# Altium PCB Quadcopter_Main_PCB.PcbDoc (part 1 of 2)
Units mm, origin at the board's own origin, x right, y up, seen from the top; angles counter-clockwise.
Board outline 73 x 59 mm, 4 copper layers (Top Layer, Int1 (GND), Int2 (PWR), Bottom Layer), stack 1.586 mm thick; 101 components, 81 nets, 440 pads, 232 vias.
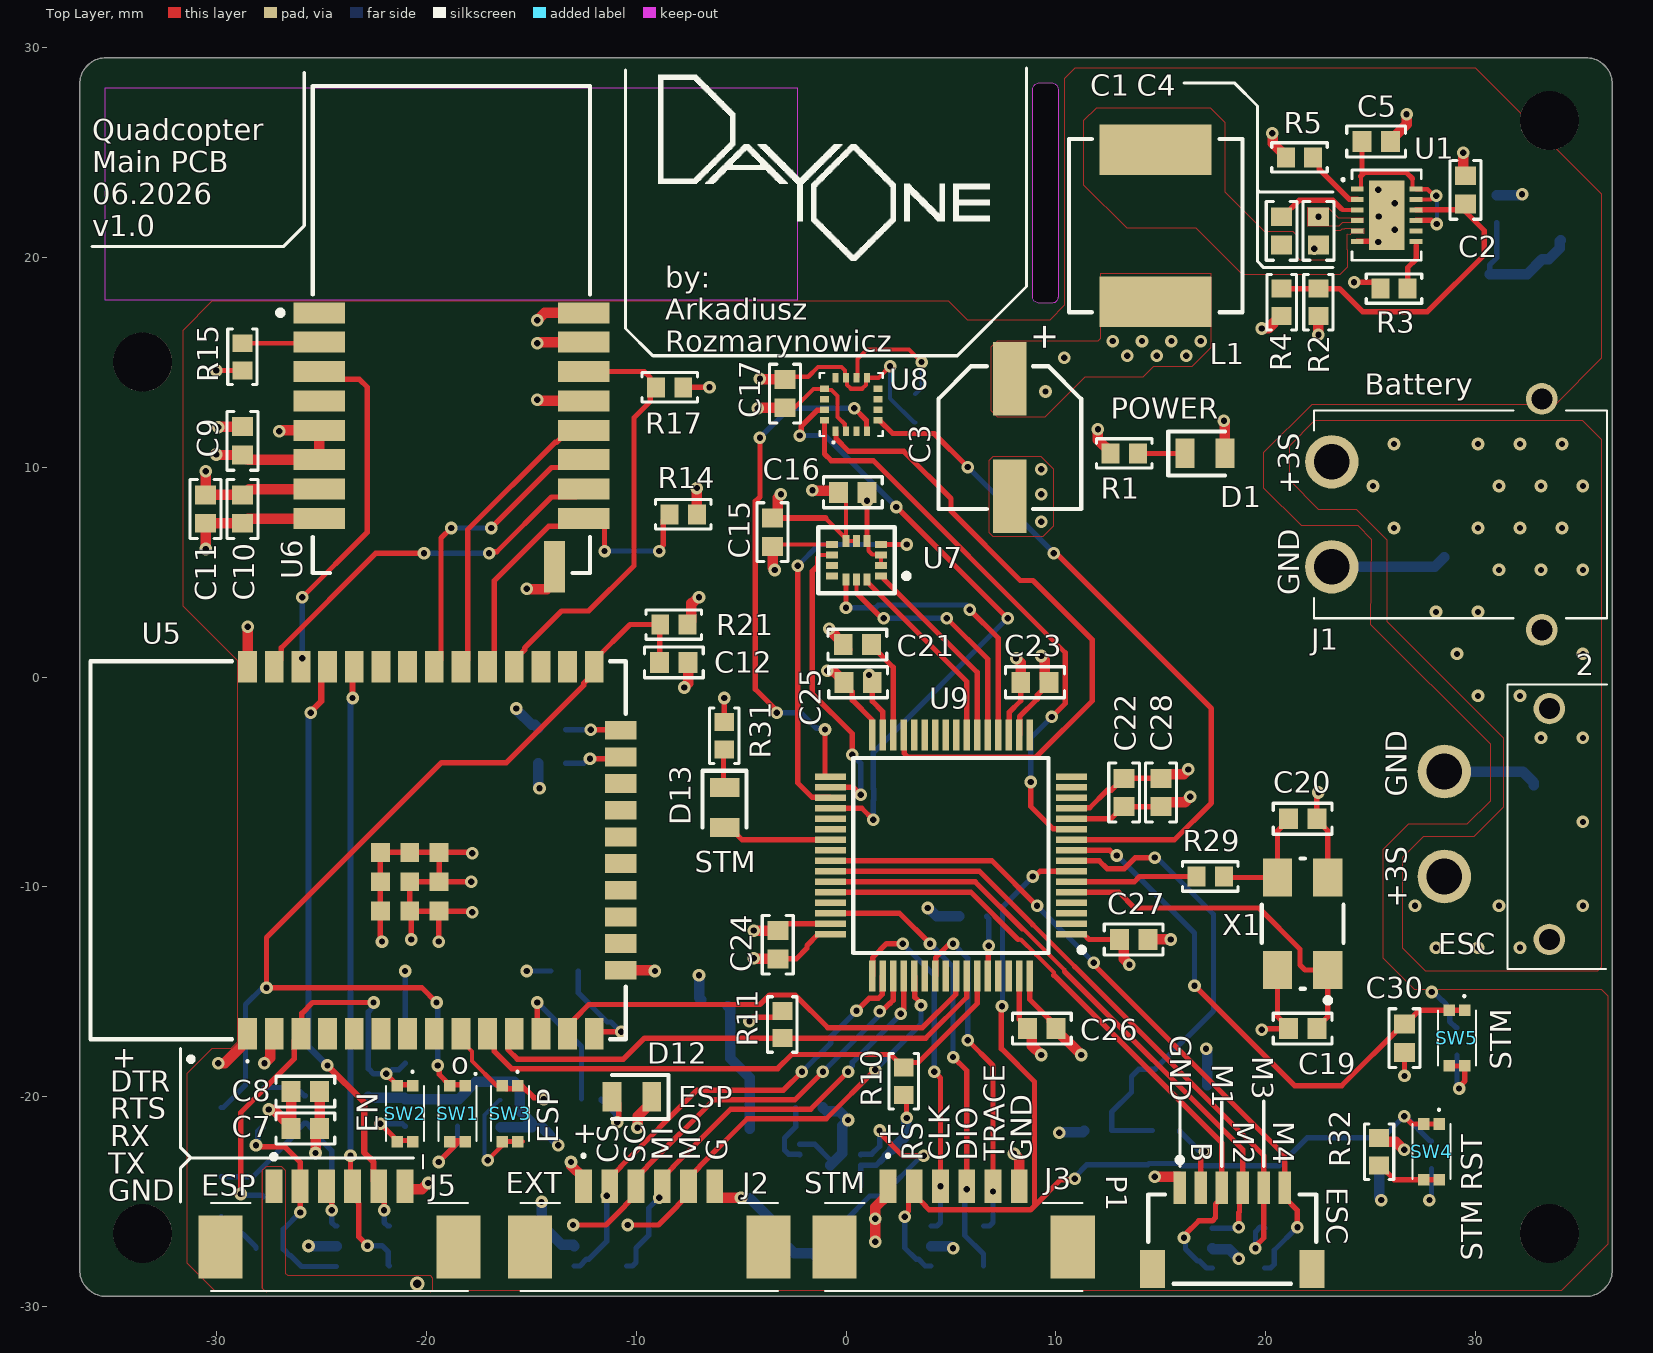
[diagram p0: Top Layer view]
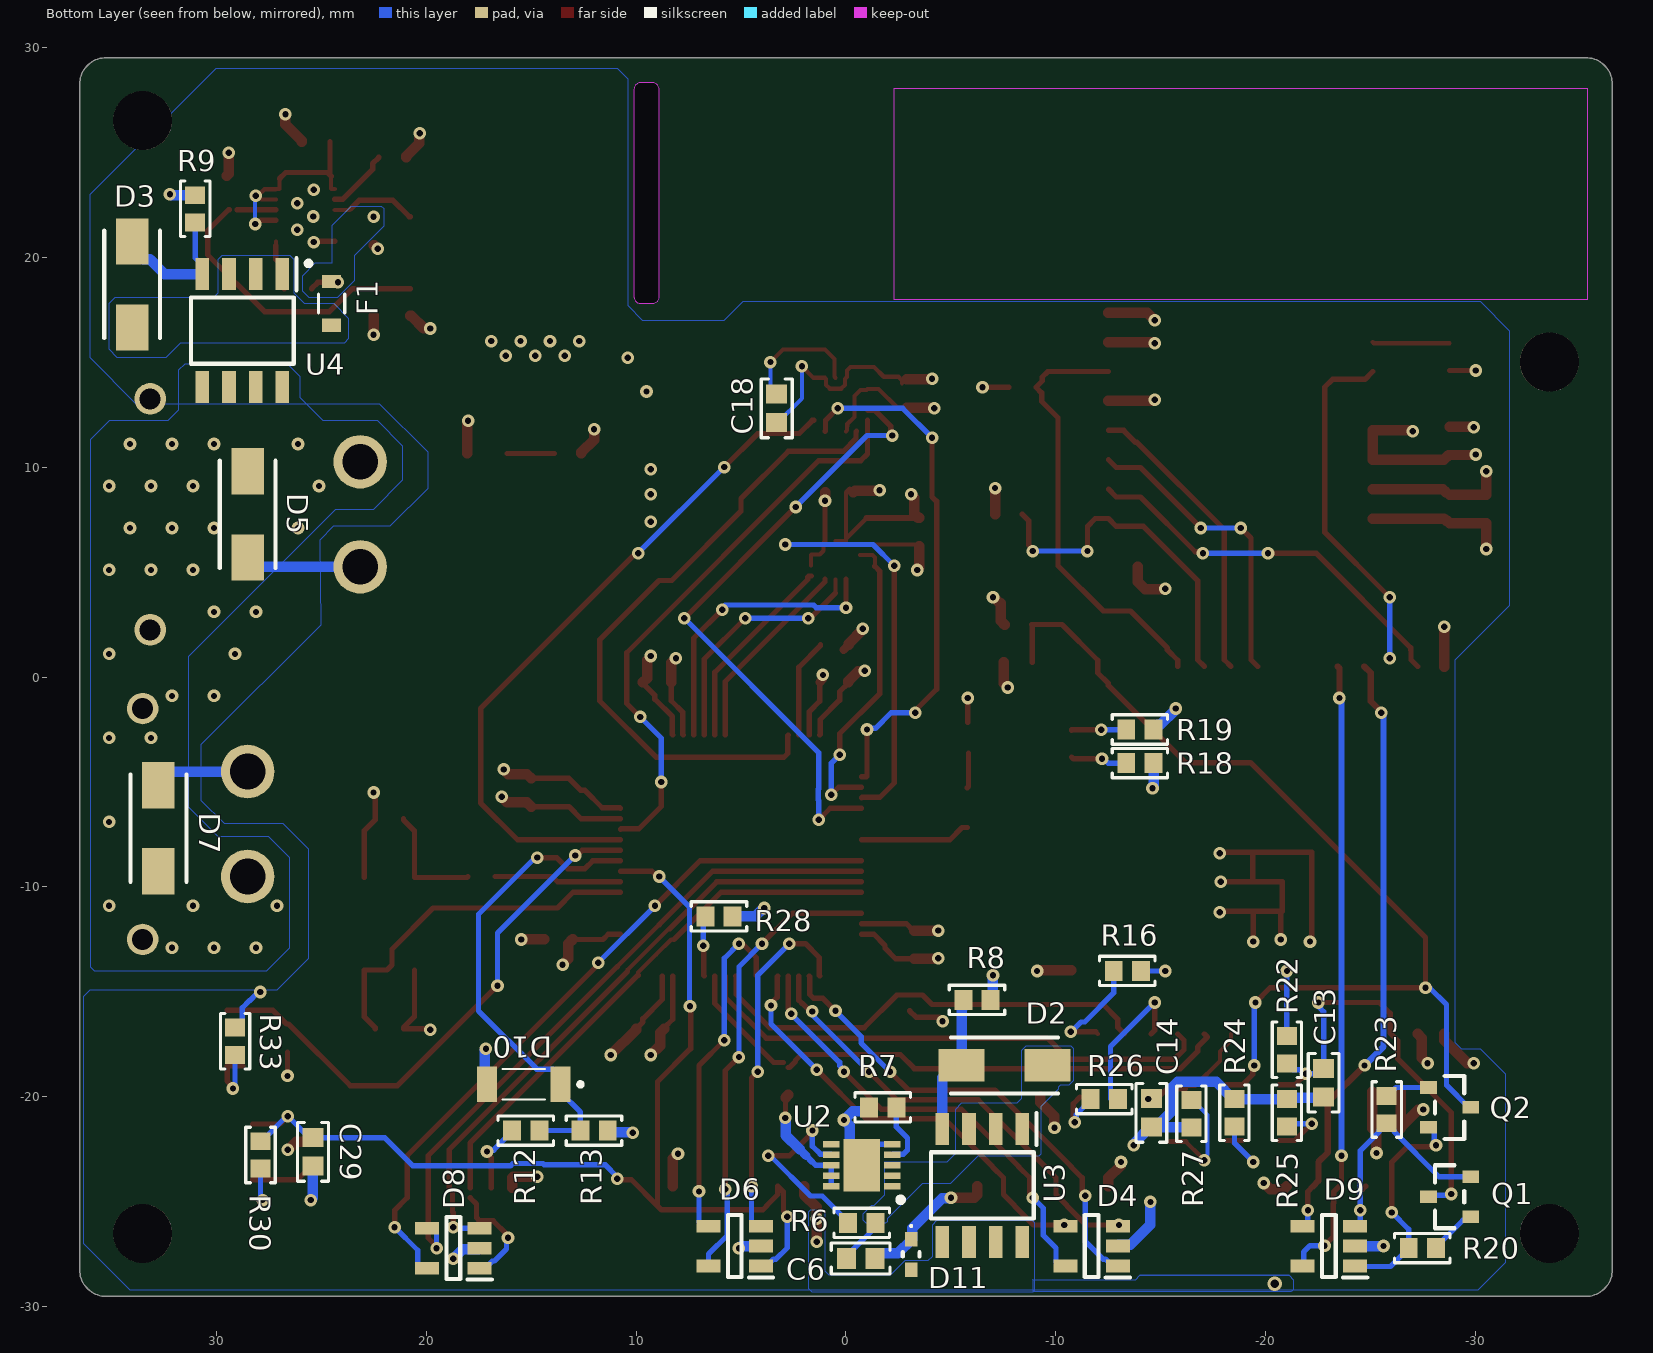
[diagram p1: Bottom Layer view, seen from below]
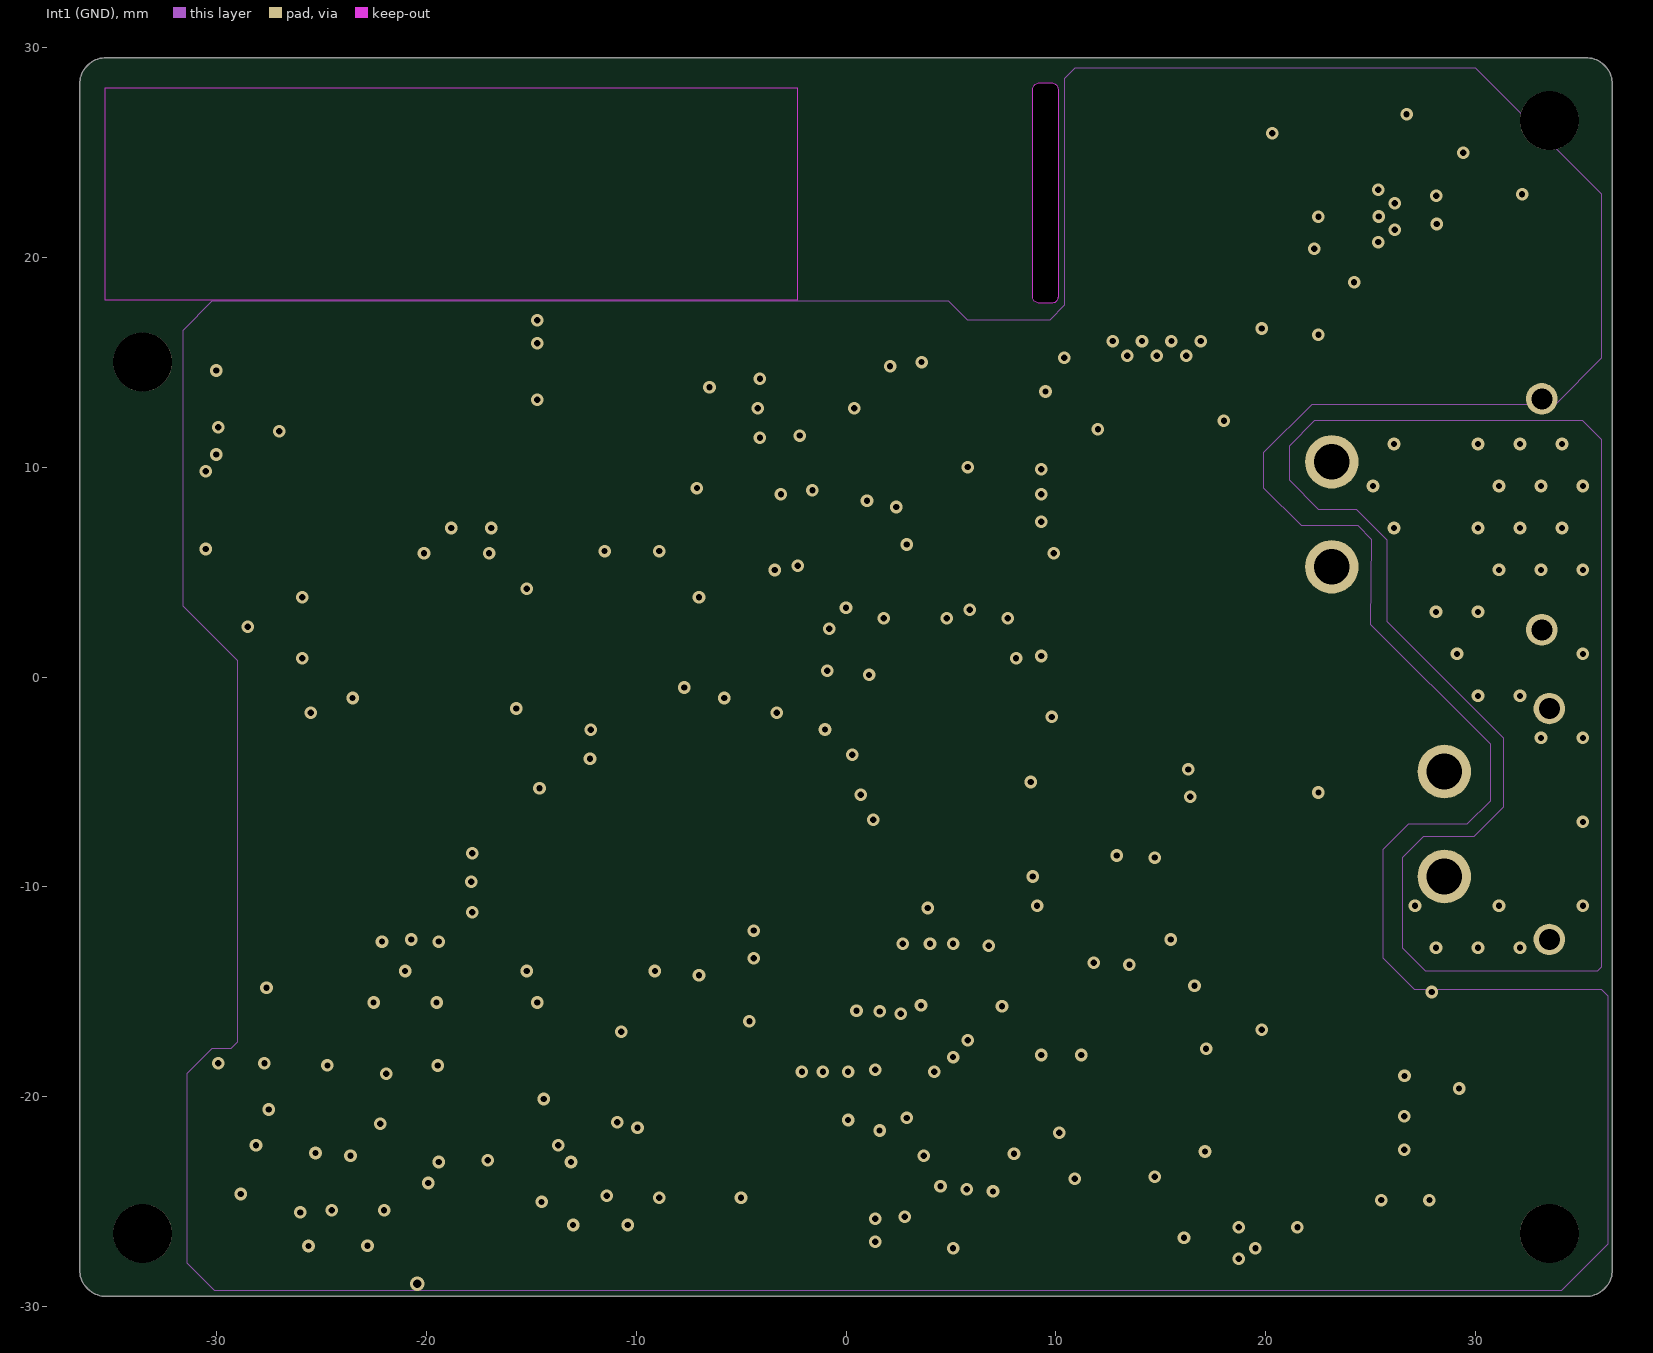
[diagram p2: Int1 (GND)]
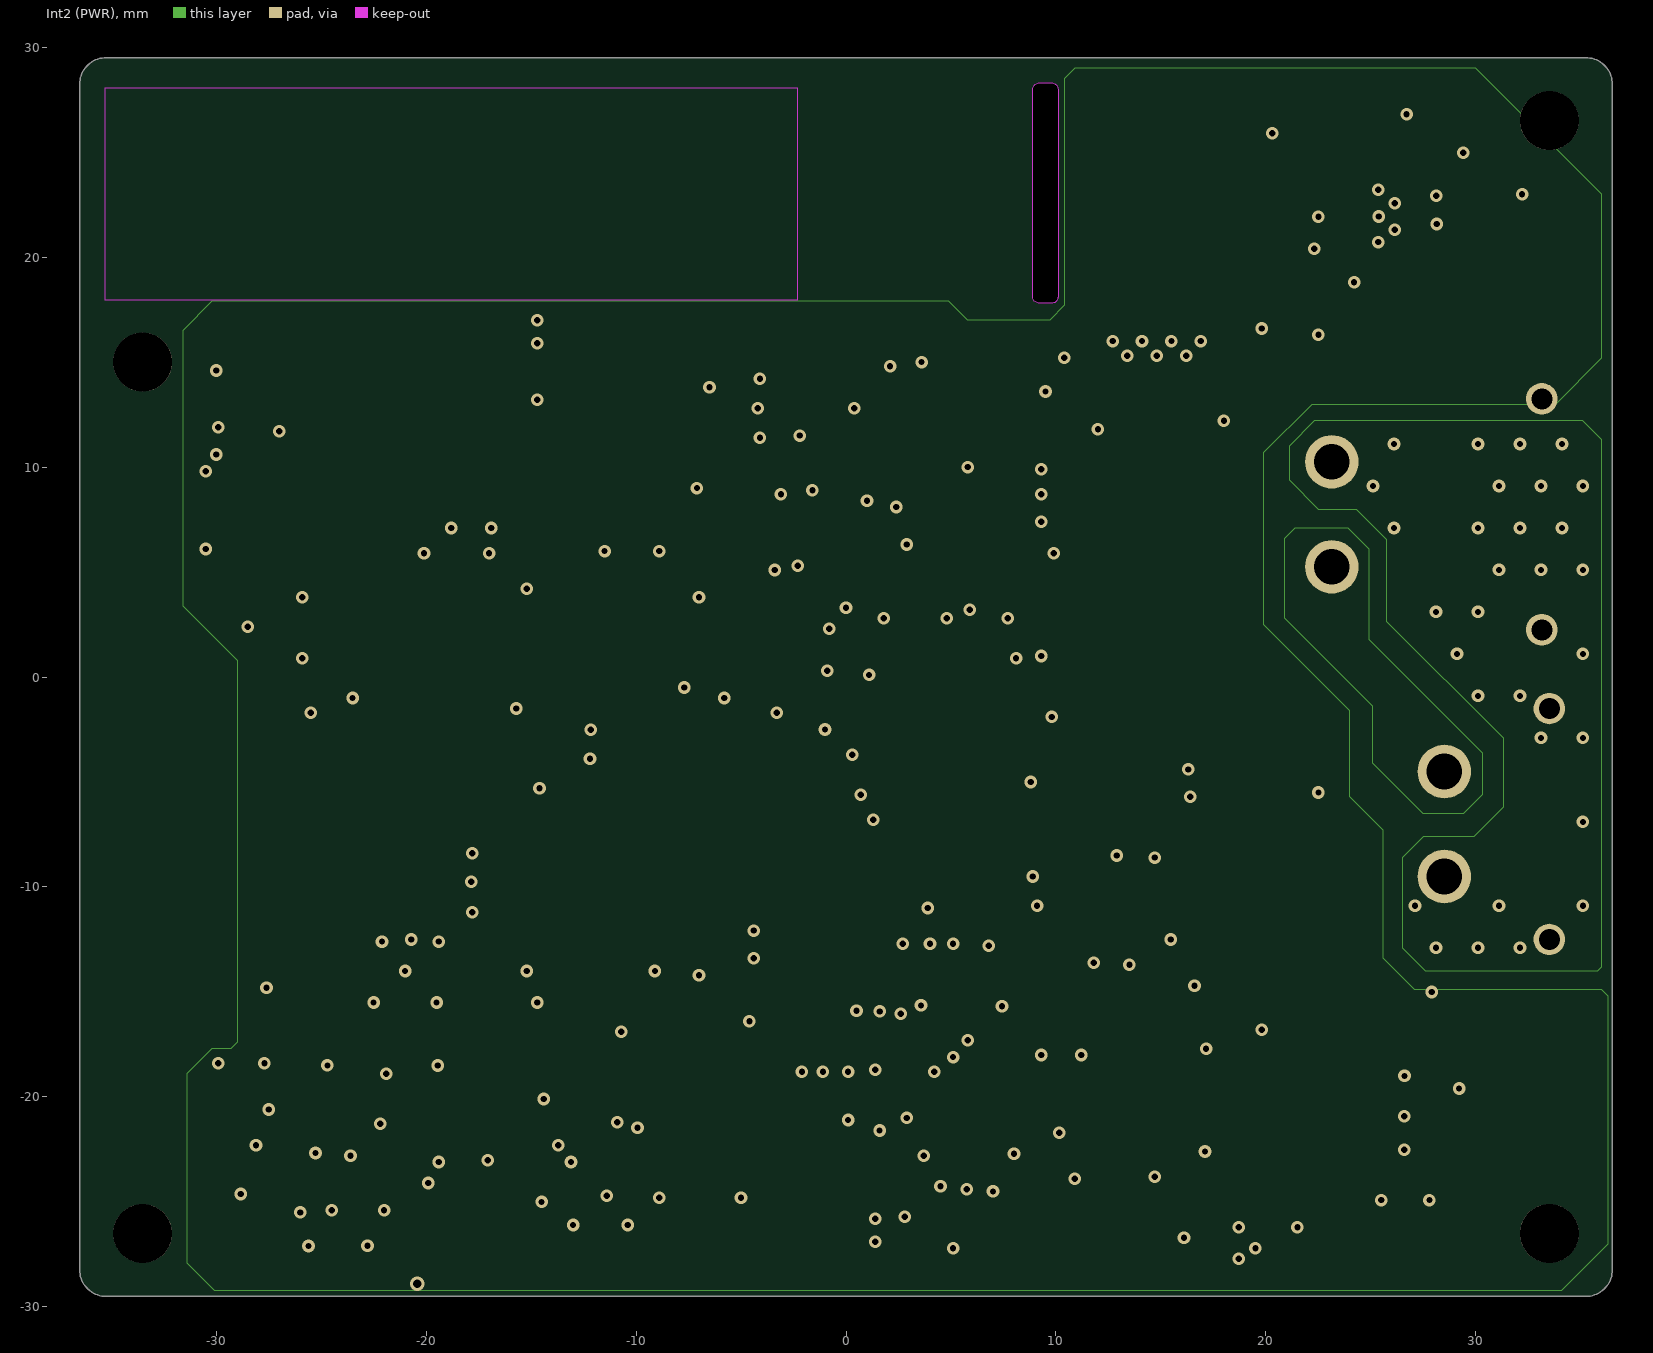
[diagram p3: Int2 (PWR)]
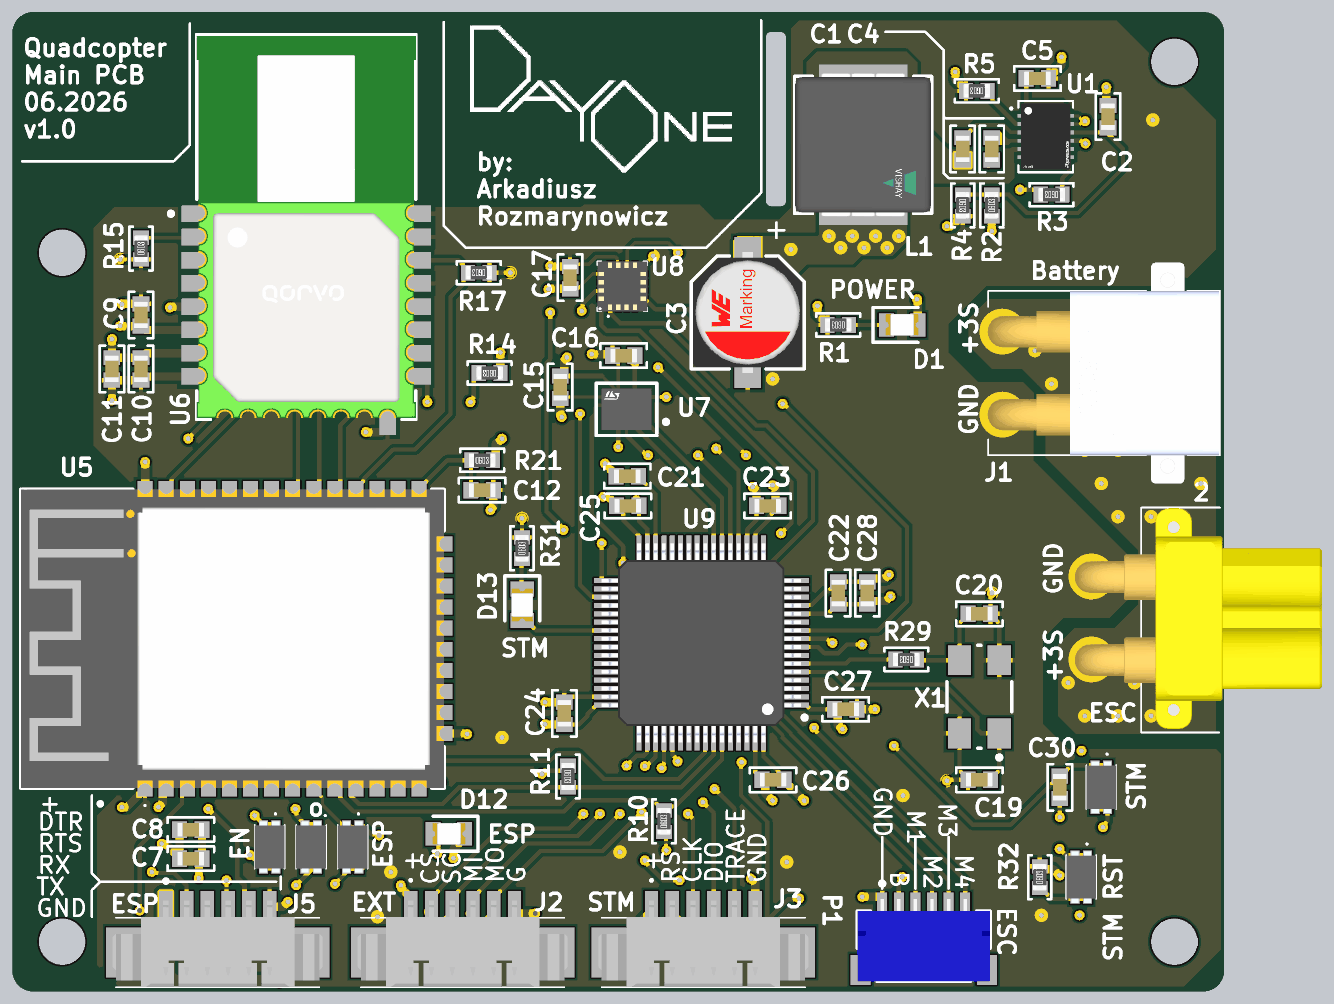
[diagram p5: 3D render of the assembled board from above, using the file's embedded part models]
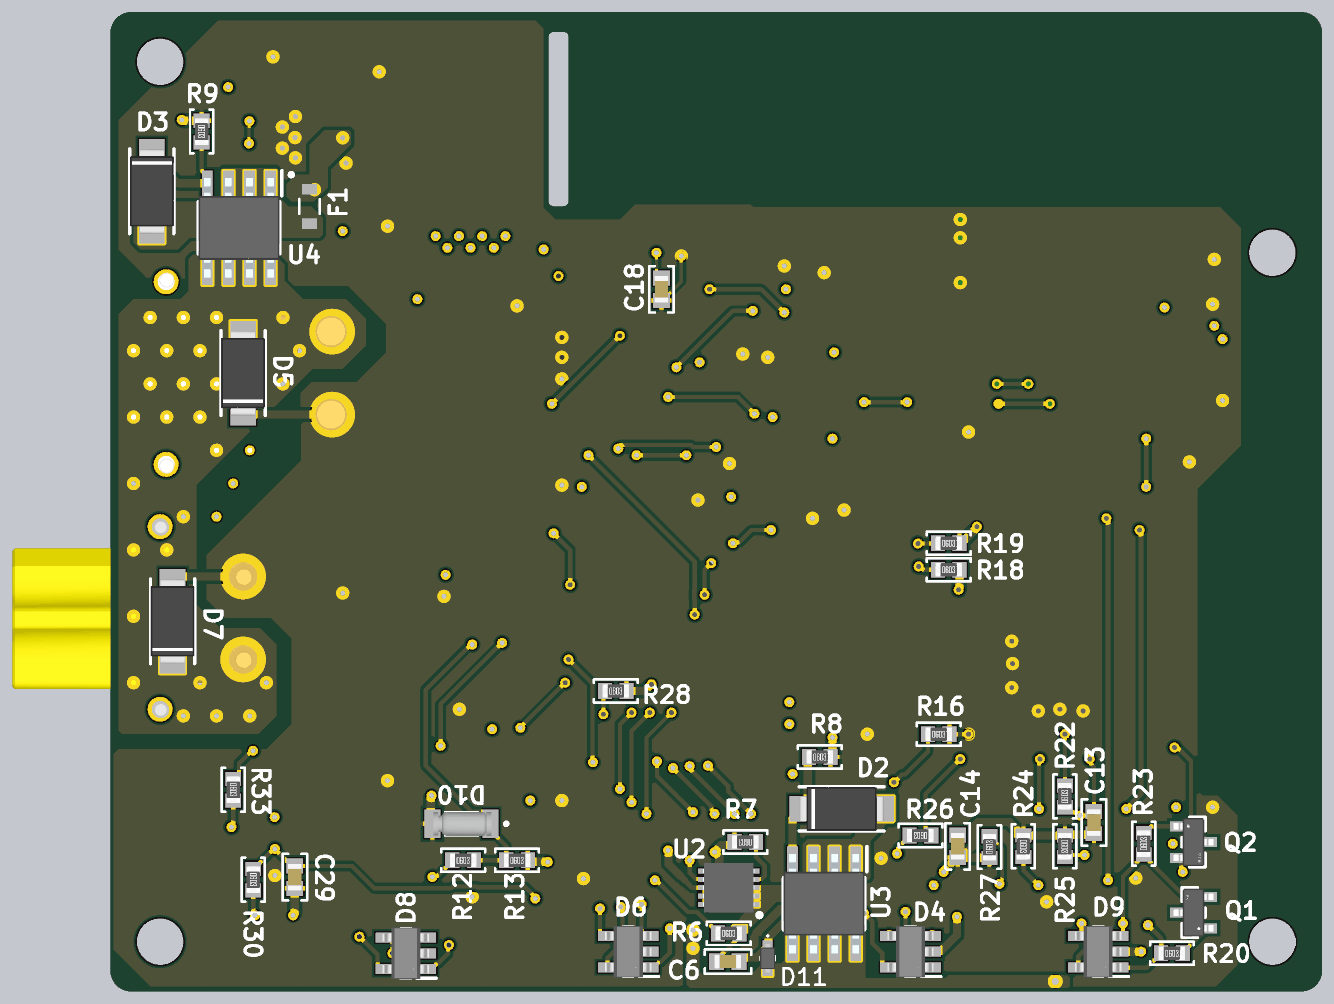
[diagram p6: 3D render of the assembled board from below, using the file's embedded part models]

## Layer stack, top to bottom
Top Solder: solder mask 0.0254, SM-001, Dk 4
Top Layer: signal copper 0.035
Dielectric 2: prepreg 0.2104, PP-017, Dk 4.3
Int1 (GND): signal copper 0.0152
Dielectric 3: core 1.065, Core-039, Dk 4.8
Int2 (PWR): signal copper 0.0152
Dielectric 4: prepreg 0.2104, PP-017, Dk 4.3
Bottom Layer: signal copper 0.035
Bottom Solder: solder mask 0.0254, SM-001, Dk 4

## Board outline
-35.23,-29.5 cw(c-35.23,-28.23) -36.5,-28.23 -36.5,28.23 cw(c-35.23,28.23) -35.23,29.5 35.23,29.5 cw(c35.23,28.23) 36.5,28.23 36.5,-28.23 cw(c35.23,-28.23) 35.23,-29.5
cut-out: 8.9,18.1 8.9,28 cw(c9.2,28) 9.2,28.3 9.8,28.3 cw(c9.8,28) 10.1,28 10.1,18.1 cw(c9.8,18.1) 9.8,17.8 9.2,17.8 cw(c9.2,18.1)

## Design rules (kind name [scope] priority, off if disabled: settings)
AssemblyTestpoint [All] p1: testpointundercomponent=TRUE minsize=1.016 maxsize=2.54 preferedsize=1.524 minholesize=0 maxholesize=1.016 preferedholesize=0.813 testpointgrid=0.025 usegrid=TRUE gridoriginx=0 gridoriginy=-25.4 gridtolerance=0 allowsidetop=TRUE allowsidebottom=TRUE
BoardOutlineClearance [All] p1: gap=0.2 ignorepadtopadclearanceinfootprint=FALSE
Clearance [All] p1: gap=0.2 ignorepadtopadclearanceinfootprint=TRUE except(0.12: SMDPad-Fill; 0.19: Track-SMDPad)
FabricationTestpoint [All] p1: side=3 testpointundercomponent=TRUE minsize=1.016 maxsize=2.54 preferedsize=1.524 minholesize=0 maxholesize=1.016 preferedholesize=0.813 testpointgrid=0.025 allowsidetop=TRUE allowsidebottom=TRUE usegrid=TRUE gridoriginx=0 gridoriginy=-787.4 gridtolerance=0
HoleSize [All] p1: absolutevalues=TRUE maxlimit=3 minlimit=0.025 maxpercent=80.000 minpercent=20.000
MinimumSolderMaskSliver [All] p1: minsoldermaskwidth=0.14
PolygonConnect PolygonConnect_1 [InNet('GND')] p1: thpad.connectstyle=Direct thpad.reliefconductorwidth=0.254 thpad.reliefentries=4 thpad.polygonreliefangle="90 Angle" thpad.airgapwidth=0.254 smdpad.connectstyle=Relief smdpad.reliefconductorwidth=0.254 smdpad.reliefentries=4 smdpad.polygonreliefangle="90 Angle" smdpad.airgapwidth=0.254 via.connectstyle=Direct via.reliefconductorwidth=0.254 via.reliefentries=4 via.polygonreliefangle="90 Angle" via.airgapwidth=0.254
PolygonConnect [All] p2: connectstyle=Direct reliefconductorwidth=0.254 reliefentries=4 polygonreliefangle="90 Angle" airgapwidth=0.254
RoutingVias [All] p1: holewidth=0.3 width=0.6 viastyle="Through Hole" minholewidth=0.3 minwidth=0.5 maxholewidth=0.3 maxwidth=0.7
SilkToSilkClearance [All] p1: silktosilkclearance=0.15
SilkToSolderMaskClearance [IsPad] p1: minsilkscreentomaskgap=0.15 clearancetoexposedcopper=TRUE
SolderMaskExpansion [All] p1: expansion=0.102 istentingtop=FALSE
SupplyNets "Schematic Supply Nets_5" [InNet('VIN_Programer')] p1: voltage=0.000
SupplyNets "Schematic Supply Nets_4" [InNet('Battery_Protected')] p2: voltage=0.000
SupplyNets "Schematic Supply Nets_3" [InNet('3V3')] p3: voltage=0.000
SupplyNets "Schematic Supply Nets_2" [InNet('VIN_Battery')] p4: voltage=0.000
SupplyNets "Schematic Supply Nets" [InNet('GND')] p5: voltage=0.000
UnRoutedNet [All] p1: checkbadconnections=TRUE
Width [All] p1: maxlimit=0.5 minlimit=0.2 preferedwidth=0.254
23 further rules are at their usual default settings.

## Classes and differential pairs
component class main: R10 R11
component class U_STM32: C19 C20 C21 C22 C23 C24 C25 C26 C27 C28 R28 R29 U9 X1
component class U_Interface_STM32: C29 C30 D13 R30 R31 R32 R33 SW4 SW5
component class U_UWB_Positioning: C7 C8 C9 C10 C11 C12 C13 C14 D12 Q1 Q2 R14 R15 R16 R17 R18 R19 R20 R21 R22 R23 R24 R25 R26 R27 SW1 SW2 SW3 U5 U6
component class U_Sensors: C15 C16 C17 C18 U7 U8
component class U_Connectors: 2 D4 D5 D6 D7 D8 D9 D10 D11 J1 J2 J3 J5 P1 R12 R13
component class U_Power: C1 C2 C4 C5 C6 D1 D2 D3 F1 L1 R1 R2 R3 R4 R5 R6 R7 R8 R9 U1 U2 U3 U4

## Components (designator, comment, footprint, x,y, rotation, side; value= is the part's Value field where it differs from the comment)
2 "ESC Power Output" XT30PWF 28.5,-4.5 r270 top (schematic designator J4)
C1 "100nF" Cap_0603_Medium_Density 20.75,21.25 r90 top
C2 "27pF" Cap_0603_Medium_Density 29.5,23.2 r90 top
C3 "100uF" WCAP-ASLL_D6.3H5.5 7.8,11.4 r90 top
C4 "4.7uF" Cap_0603_Medium_Density 22.5,21.25 r90 top
C5 "1uF" Cap_0603_Medium_Density 25.25,25.5 r180 top
C6 "22uF" Cap_0603_Medium_Density -0.7,-27.7 r0 bottom
C7 "2.2uF" Cap_0603_Medium_Density -25.75,-21.5 r0 top
C8 "100nF" Cap_0603_Medium_Density -25.75,-19.75 r0 top
C9 "100nF" Cap_0603_Medium_Density -28.75,11.25 r90 top
C10 "100nF" Cap_0603_Medium_Density -28.75,8 r270 top
C11 "2.2uF" Cap_0603_Medium_Density -30.5,8 r270 top
C12 "100nF" Cap_0603_Medium_Density -8.2,0.7 r0 top
C13 "100nF" Cap_0603_Medium_Density -22.75,-19.325 r270 bottom
C14 "100nF" Cap_0603_Medium_Density -14.543,-20.755 r90 bottom
C15 "100nF" Cap_0603_Medium_Density -3.5,6.9 r270 top
C16 "100nF" Cap_0603_Medium_Density 0.325,8.8 r0 top
C17 "1uF" Cap_0603_Medium_Density -2.9,13.5 r270 top
C18 "10uF" Cap_0603_Medium_Density 3.3,12.8 r90 bottom
C19 "30pF" Cap_0603_Medium_Density 21.75,-16.75 r0 top
C20 "30pF" Cap_0603_Medium_Density 21.75,-6.75 r180 top
C21 "4.7uF, <1ohm ESR" Cap_0603_Medium_Density 0.543,1.542 r0 top value=4.7uF
C22 "100nF" Cap_0603_Medium_Density 13.25,-5.5 r90 top
C23 "100nF" Cap_0603_Medium_Density 9,-0.25 r180 top
C24 "100nF" Cap_0603_Medium_Density -3.25,-12.75 r270 top
C25 "100nF" Cap_0603_Medium_Density 0.575,-0.25 r180 top
C26 "100nF" Cap_0603_Medium_Density 9.325,-16.75 r0 top
C27 "100nF" Cap_0603_Medium_Density 13.7,-12.5 r180 top
C28 "2.2uF" Cap_0603_Medium_Density 15,-5.5 r90 top
C29 "100nF" Cap_0603_Medium_Density 25.388,-22.612 r90 bottom
C30 "100nF" Cap_0603_Medium_Density 26.6,-17.2 r270 top
D1 "LS_R976" LEDC2012X40N 17.1,10.65 r0 top
D2 "13.3V Clamp" DIONM5127X250N -7.55,-18.5 r180 bottom
D3 "13.3V Clamp" DIONM5127X250N 34,18.7 r270 bottom
D4 "RCLAMP3354S.TCT" SOT95P280X145-5N -11.7,-27.1 r0 bottom
D5 "TVS" DIONM5127X250N 28.5,7.75 r90 bottom
D6 "RCLAMP3354S.TCT" SOT95P280X145-5N 5.3,-27.1 r0 bottom
D7 "TVS" DIONM5127X250N 32.75,-7.2 r90 bottom
D8 "RCLAMP3354S.TCT" SOT95P280X145-5N 18.7,-27.2 r0 bottom
D9 "RCLAMP3354S.TCT" SOT95P280X145-5N -23,-27.1 r0 bottom
D10 "ZMM33B" ZMM33B 15.35,-19.4 r0 bottom
D11 "TVS" AQ120501LTG -3.1,-27.5 r270 bottom
D12 "LS_R976" LEDC2012X40N -10.2,-20 r180 top
D13 "LS_R976" LEDC2012X40N -5.782,-6.216 r270 top
F1 "1A PPTC" "CHIP_ 0603L_1P8X1_LTF" 24.5,17.793 r90 bottom
J1 "Battery Plug" XT30PWM 29.05,7.75 r270 top
J2 "53261-0671" 532610671 -9.375,-27.15 r0 top
J3 "53261-0671" 532610671 5.125,-27.15 r0 top
J5 "53261-0671" 532610671 -24.125,-27.15 r0 top
L1 "22uH 8282" FP-IHLP-3232DZ-FP_2_413x5-MFG 14.75,21.5 r270 top
P1 "SM06B-SRSS-TB(LF)(SN)" JST-SM06B-SRSS-TB_V 18.4,-26.775 r0 top
Q1 "SS8050-G" FP-SS8050-G-MFG -28.75,-24.75 r0 bottom
Q2 "SS8050-G" FP-SS8050-G-MFG -28.75,-20.5 r180 bottom
R1 "120R" Res_0603_Medium_Density 13.25,10.65 r180 top
R2 "100k" Res_0603_Medium_Density 22.5,17.85 r90 top
R3 "100k" Res_0603_Medium_Density 26.1,18.5 r180 top
R4 "22.1k" Res_0603_Medium_Density 20.75,17.85 r270 top
R5 "100k" Res_0603_Medium_Density 21.6,24.75 r180 top
R6 "10k" Res_0603_Medium_Density -0.75,-26 r180 bottom
R7 "10k" Res_0603_Medium_Density -1.75,-20.5 r0 bottom
R8 "220R" Res_0603_Medium_Density -6.238,-15.378 r180 bottom
R9 "220R" Res_0603_Medium_Density 31,22.3 r270 bottom
R10 "4.7k" Res_0603_Medium_Density 2.75,-19.25 r90 top
R11 "4.7k" Res_0603_Medium_Density -3.033,-16.55 r270 top
R12 "270k" Res_0603_Medium_Density 15.25,-21.6 r180 bottom
R13 "100k" Res_0603_Medium_Density 12,-21.6 r180 bottom
R14 "10k" Res_0603_Medium_Density -7.75,7.75 r180 top
R15 "10k" Res_0603_Medium_Density -28.75,15.25 r90 top
R16 "10k" Res_0603_Medium_Density -13.4,-14 r180 bottom
R17 "10k" Res_0603_Medium_Density -8.4,13.8 r180 top
R18 "10k" Res_0603_Medium_Density -14,-4.1 r180 bottom
R19 "10k" Res_0603_Medium_Density -14,-2.5 r180 bottom
R20 "10k" Res_0603_Medium_Density -27.45,-27.2 r180 bottom
R21 "10k" Res_0603_Medium_Density -8.2,2.5 r0 top
R22 "10k" Res_0603_Medium_Density -21,-17.75 r90 bottom
R23 "10k" Res_0603_Medium_Density -25.75,-20.6 r90 bottom
R24 "220R" Res_0603_Medium_Density -18.5,-20.75 r270 bottom
R25 "220R" Res_0603_Medium_Density -21,-20.75 r270 bottom
R26 "120R" Res_0603_Medium_Density -12.3,-20.1 r0 bottom
R27 "220R" Res_0603_Medium_Density -16.454,-20.8 r90 bottom
R28 "10k" Res_0603_Medium_Density 6.05,-11.4 r180 bottom
R29 "0R" Res_0603_Medium_Density 17.35,-9.5 r180 top
R30 "10k" Res_0603_Medium_Density 27.888,-22.762 r270 bottom
R31 "120R" Res_0603_Medium_Density -5.8,-2.8 r90 top
R32 "220R" Res_0603_Medium_Density 25.388,-22.612 r90 top
R33 "220R" Res_0603_Medium_Density 29.1,-17.35 r270 bottom
SW1 "USLPT2616CT2TR" USLPT2616CT2TR -18.5,-20.8 r270 top
SW2 "USLPT2616CT2TR" USLPT2616CT2TR -21,-20.8 r270 top
SW3 "USLPT2616CT2TR" USLPT2616CT2TR -16,-20.8 r270 top
SW4 "USLPT2616CT2TR" USLPT2616CT2TR 27.888,-22.612 r270 top
SW5 "USLPT2616CT2TR" USLPT2616CT2TR 29.1,-17.2 r270 top
U1 "ISL85410FRZ-T" L12_4x3_MFG 25.75,22 r0 top
U2 "STEF4SPUR" SON50P300X300X80-11N-D -0.75,-23.25 r0 bottom
U3 "DMP3056LSS-13" SOIC127P600X170-8N -6.495,-24.212 r270 bottom
U4 "DMP3056LSS-13" SOIC127P600X170-8N 28.75,16.5 r270 bottom
U5 "ESP32-WROOM-32E-N8R2" ESP32WROOM32EN8R2 -23.24,-8.25 r90 top
U6 "DWM1000" FP-DWM1000-MFG -18.795,16.55 r0 top
U7 "LSM6DSOTR" FP-LGA-14L-DM00249496-MFG 0.5,5.563 r180 top
U8 "MMC5983MA" MMC5983MA 0.25,12.975 r180 top
U9 "STM32F413RHT3" QFP50P1200X1200X160-64N 5,-8.5 r180 top
X1 "8MHz" ABRA-ABMM2-4_V 21.75,-11.75 r90 top

## Footprints (in the part's own frame and the unit in brackets; to place one, negate y for a bottom-side part, rotate by r counter-clockwise, add the part's x,y. Pads: shape width x height; smd on the part's side, far side on the other; paste and mask are expansions set on the pad)
532610671 [mm]
  rect 0.8x1.6 smd: 1(-3.125,2.9) 2(-1.875,2.9) 3(-0.625,2.9) 4(0.625,2.9) 5(1.875,2.9) 6(3.125,2.9)
  rect 2.1x3 smd: MP1(-5.675,0) MP2(5.675,0)
  silkscreen extent -6.12,-2.1 6.12,4.4, body extent -6.32,-2.07 6.32,3.13, height 3.4
ABRA-ABMM2-4_V [mm] "SMD, 4-Leads, Body 6.2x3.9mm, Pitch 4.4mm, Height 1.2mm"
  rect 1.8x1.4 smd: 1(-2.2,-1.2) 2(2.2,-1.2) 3(2.2,1.2) 4(-2.2,1.2)
  silkscreen extent -3.77,-1.95 3.1,1.95, body extent -3.1,-1.95 3.1,1.95, height 1.2
AQ120501LTG [mm]
  rect 0.7x0.6 smd: 1(-0.725,0) 2(0.725,0)
  silkscreen extent -1.4,-0.4 0.1,0.4, body extent -0.85,-0.45 0.85,0.45, height 0.75
Cap_0603_Medium_Density [mm] "Chip Capacitor, 0603, 2-Leads, Body 1.60x0.80mm, IPC Medium Density"
  rect 0.9x1 smd: 1(-0.675,0) 2(0.675,0)
  silkscreen extent -1.4,-0.74 1.4,0.74, body extent -0.8,-0.41 0.8,0.41, height 0.82
"CHIP_ 0603L_1P8X1_LTF" [mm]
  rect 0.631x0.898 smd paste+0 mask+0: 1(-1.043,0) 2(1.043,0)
  silkscreen extent -0.44,-0.62 0.44,0.62
DIONM5127X250N [mm]
  rect 2.2x1.55 smd: 1(-2.05,0) 2(2.05,0)
  silkscreen extent -2.55,-1.33 2.55,1.33, body extent -2.55,-1.33 2.55,1.33, height 2.25
ESP32WROOM32EN8R2 [mm]
  rect 1.5x0.9 smd: 1(-8.75,5.26) 2(-8.75,3.99) 3(-8.75,2.72) 4(-8.75,1.45) 5(-8.75,0.18) 6(-8.75,-1.09) 7(-8.75,-2.36) 8(-8.75,-3.63) 9(-8.75,-4.9) 10(-8.75,-6.17) 11(-8.75,-7.44) 12(-8.75,-8.71) 13(-8.75,-9.98) 14(-8.75,-11.25) 25(8.75,-11.25) 26(8.75,-9.98) 27(8.75,-8.71) 28(8.75,-7.44) 29(8.75,-6.17) 30(8.75,-4.9) 31(8.75,-3.63) 32(8.75,-2.36) 33(8.75,-1.09) 34(8.75,0.18) 35(8.75,1.45) 36(8.75,2.72) 37(8.75,3.99) 38(8.75,5.26)
  rect 0.9x1.5 smd: 15(-5.715,-12.5) 16(-4.445,-12.5) 17(-3.175,-12.5) 18(-1.905,-12.5) 19(-0.635,-12.5) 20(0.635,-12.5) 21(1.905,-12.5) 22(3.175,-12.5) 23(4.445,-12.5) 24(5.715,-12.5)
  rect 0.9x0.9 smd: 39(-1.5,-2.46) 40(-2.9,-2.46) 41(-2.9,-3.86) 42(-1.5,-3.86) 43(-0.1,-3.86) 44(-0.1,-2.46) 45(-0.1,-1.06) 46(-1.5,-1.06) 47(-2.9,-1.06)
  silkscreen extent -10.1,-12.75 9,12.75, body extent -9,-12.75 9,12.75, height 4.05
FP-DWM1000-MFG [mm]
  rect 2.45x1 smd paste+0 mask+0: 1(-6.295,0.8) 2(-6.295,-0.6) 3(-6.295,-2) 4(-6.295,-3.4) 5(-6.295,-4.8) 6(-6.295,-6.2) 7(-6.295,-7.6) 8(-6.295,-9) 17(6.295,-9) 18(6.295,-7.6) 19(6.295,-6.2) 20(6.295,-4.8) 21(6.295,-3.4) 22(6.295,-2) 23(6.295,-0.6) 24(6.295,0.8)
  rect 1x2.45 smd paste+0 mask+0: 16(4.9,-11.295)
  Keep-Out Layer region: -16.5,1.42 16.5,1.42 16.5,11.495 -16.5,11.495
  Keep-Out Layer region: -16.5,1.42 16.5,1.42 16.5,11.495 -16.5,11.495
  silkscreen extent -8.27,-11.6 6.6,11.6, body extent -7.62,-12.62 7.62,11.7, height 0.25
FP-IHLP-3232DZ-FP_2_413x5-MFG [mil]
  rect 95x210 smd paste+0 mask+0: 1(-142.5,0) 2(142.5,0)
  silkscreen extent -163,-163 163,163, body extent -194,-166 194,166, height 10
FP-LGA-14L-DM00249496-MFG [mm]
  rect 0.575x0.35 smd paste+0 mask+0: 1(-1.162,0.75) 2(-1.162,0.25) 3(-1.162,-0.25) 4(-1.162,-0.75) 8(1.162,-0.75) 9(1.162,-0.25) 10(1.162,0.25) 11(1.162,0.75)
  rect 0.35x0.575 smd paste+0 mask+0: 5(-0.5,-0.913) 6(0,-0.913) 7(0.5,-0.913) 12(0.5,0.913) 13(0,0.913) 14(-0.5,0.913)
  silkscreen extent -2.5,-1.58 1.83,1.58, body extent -2.05,-1.8 2.05,1.8, height 0.25
FP-SS8050-G-MFG [mm]
  rect 0.8x0.6 smd paste+0 mask+0: 1(-1.01,0.95) 2(-1.01,-0.95) 3(1.01,0)
  silkscreen extent -0.7,-1.5 0.7,1.5, body extent -1.21,-1.45 1.21,1.45, height 1.15
JST-SM06B-SRSS-TB_V [mm] "SMD, 6-Leads, Body 8x4.25mm, Pitch 1mm"
  rect 0.6x1.55 smd: 1(-2.5,2.45) 2(-1.5,2.45) 3(-0.5,2.45) 4(0.5,2.45) 5(1.5,2.45) 6(2.5,2.45)
  rect 1.2x1.8 smd: MP1(-3.8,-1.425) MP2(3.8,-1.425)
  silkscreen extent -4,-2.12 4,3.9, body extent -4,-2.12 4,2.83, height 2.96
L12_4x3_MFG [mm] "Recommended Land Pattern"
  rect 0.6x0.23 smd paste+0 mask+0: 1(-1.4,1.25) 2(-1.4,0.75) 3(-1.4,0.25) 4(-1.4,-0.25) 5(-1.4,-0.75) 6(-1.4,-1.25) 7(1.4,-1.25) 8(1.4,-0.75) 9(1.4,-0.25) 10(1.4,0.25) 11(1.4,0.75) 12(1.4,1.25)
  rect 1.7x3.3 smd paste+0 mask+0: 13(0,0)
  silkscreen extent -2.14,-2.15 1.65,2.15, body extent -1.5,-2 1.5,2, height 1
LEDC2012X40N [mm]
  rect 0.9x1.4 smd: 1(-0.95,0) 2(0.95,0)
  silkscreen extent -1.75,-1.05 0.95,1.05, body extent -1,-0.65 1,0.65, height 0.8
MMC5983MA [mm]
  rect 0.3x0.45 smd: 1(0.75,1.275) 2(0.25,1.275) 3(-0.25,1.275) 4(-0.75,1.275) 9(-0.75,-1.275) 10(-0.25,-1.275) 11(0.25,-1.275) 12(0.75,-1.275)
  rect 0.45x0.3 smd: 5(-1.275,0.75) 6(-1.275,0.25) 7(-1.275,-0.25) 8(-1.275,-0.75) 13(1.275,-0.75) 14(1.275,-0.25) 15(1.275,0.25) 16(1.275,0.75)
  silkscreen extent -1.5,-1.5 1.5,1.85, body extent -1.5,-1.5 1.5,1.5, height 1
QFP50P1200X1200X160-64N [mm]
  rect 1.475x0.3 smd: 1(-5.738,3.75) 2(-5.738,3.25) 3(-5.738,2.75) 4(-5.738,2.25) 5(-5.738,1.75) 6(-5.738,1.25) 7(-5.738,0.75) 8(-5.738,0.25) 9(-5.738,-0.25) 10(-5.738,-0.75) 11(-5.738,-1.25) 12(-5.738,-1.75) 13(-5.738,-2.25) 14(-5.738,-2.75) 15(-5.738,-3.25) 16(-5.738,-3.75) 33(5.738,-3.75) 34(5.738,-3.25) 35(5.738,-2.75) 36(5.738,-2.25) 37(5.738,-1.75) 38(5.738,-1.25) 39(5.738,-0.75) 40(5.738,-0.25) 41(5.738,0.25) 42(5.738,0.75) 43(5.738,1.25) 44(5.738,1.75) 45(5.738,2.25) 46(5.738,2.75) 47(5.738,3.25) 48(5.738,3.75)
  rect 0.3x1.475 smd: 17(-3.75,-5.738) 18(-3.25,-5.738) 19(-2.75,-5.738) 20(-2.25,-5.738) 21(-1.75,-5.738) 22(-1.25,-5.738) 23(-0.75,-5.738) 24(-0.25,-5.738) 25(0.25,-5.738) 26(0.75,-5.738) 27(1.25,-5.738) 28(1.75,-5.738) 29(2.25,-5.738) 30(2.75,-5.738) 31(3.25,-5.738) 32(3.75,-5.738) 49(3.75,5.738) 50(3.25,5.738) 51(2.75,5.738) 52(2.25,5.738) 53(1.75,5.738) 54(1.25,5.738) 55(0.75,5.738) 56(0.25,5.738) 57(-0.25,5.738) 58(-0.75,5.738) 59(-1.25,5.738) 60(-1.75,5.738) 61(-2.25,5.738) 62(-2.75,5.738) 63(-3.25,5.738) 64(-3.75,5.738)
  silkscreen extent -6.35,-4.65 4.65,4.65, body extent -6,-6 6,6, height 1.6
Res_0603_Medium_Density [mm] "Chip Resistor, 0603, 2-Leads, Body 1.60x0.80mm, IPC Medium Density"
  rect 0.85x0.95 smd: 1(-0.65,0) 2(0.65,0)
  silkscreen extent -1.32,-0.7 1.32,0.7, body extent -0.8,-0.4 0.8,0.4, height 0.45
SOIC127P600X170-8N [mm]
  rect 1.525x0.65 smd: 1(-2.688,1.905) 2(-2.688,0.635) 3(-2.688,-0.635) 4(-2.688,-1.905) 5(2.688,-1.905) 6(2.688,-0.635) 7(2.688,0.635) 8(2.688,1.905)
  silkscreen extent -3.45,-2.45 1.58,2.58, body extent -3,-2.45 3,2.45, height 1.7
SON50P300X300X80-11N-D [mm]
  rect 0.8x0.3 smd: 1(-1.45,1) 2(-1.45,0.5) 3(-1.45,0) 4(-1.45,-0.5) 5(-1.45,-1) 6(1.45,-1) 7(1.45,-0.5) 8(1.45,0) 9(1.45,0.5) 10(1.45,1)
  rect 1.746x2.484 smd: 11(0,0)
  silkscreen extent -1.97,1.53 -1.72,1.77, body extent -1.55,-1.5 1.55,1.5, height 0.8
SOT95P280X145-5N [mm]
  rect 1.15x0.6 smd: 1(-1.25,0.95) 2(-1.25,0) 3(-1.25,-0.95) 4(1.25,-0.95) 5(1.25,0.95)
  silkscreen extent -1.83,-1.48 0.33,1.5, body extent -1.4,-1.55 1.4,1.55, height 1.45
USLPT2616CT2TR [mm]
  rect 0.55x0.55 smd: 1(-1.325,0.375) 2(1.325,0.375) 3(-1.325,-0.375) 4(1.325,-0.375)
  silkscreen extent -1.95,-0.9 1.3,0.9, body extent -1.55,-0.9 1.55,0.9, height 0.65
WCAP-ASLL_D6.3H5.5 [mm] "Aluminium Electrolytic V-Chip SMT Capacitors, 6.3x5.5mm"
  rect 3.5x1.6 smd: 1(2.8,0) 2(-2.8,0)
  silkscreen extent -3.4,-3.4 3.4,3.4, body extent -3.65,-3.3 3.65,3.3, height 5.5
XT30PWF [mm]
  round 2.55 hole 1.7: 1(0,0) 2(5,0)
  round 1.5 hole 1: 3(-3,5) 4(8,5)
  silkscreen extent -4.15,3 9.4,3, body extent -4.11,-0.99 9.19,13.9, height 5.21
XT30PWM [mm]
  round 2.55 hole 1.7: 1(-2.5,-5.912) 2(2.5,-5.912)
  round 1.5 hole 1: 3(5.5,4.088) 4(-5.5,4.088)
  silkscreen extent -4.95,-6.76 4.95,7.19, body extent -6.65,-6.8 6.65,7.15, height 5.1
ZMM33B [mm]
  rect 0.95x1.7 smd: 1(-1.75,0) 2(1.75,0)
  silkscreen extent -2.8,-0.72 1,0.72, body extent -1.81,-0.72 1.69,0.72, height 1.49

## Part data
2: library part XT30PW-F, "Socket; DC supply; XT30; female; PIN:2; on PCBs; THT; Colour: yellow", Manufacturer_Name=Amass, Datasheet Link=https://www.tme.eu/Document/ce4077e36b79046da520ca73227e15de/XT30PW%20SPEC.pdf, Geometry.Height=5mm, Manufacturer_Part_Number=XT30PW-F, Part Number=XT30PW-F
C1 C8 C9 C10 C12 C13 C14 C15 C16 C22 C23 C24 C25 C26 C27 C29 C30: library part Capacitor_MLLC, Package=0603, Part Number=CC0603KRX7R8BB104, ComponentLink1Description="Online Store Link", Supplier=Mouser
C2: library part Capacitor_MLLC, Package=0603, Part Number=CC0603JRNP09BN270, ComponentLink1Description="Online Store Link", Supplier=Mouser
C3: library part CMP-03913-53914511-3, "WCAP-ASLL Aluminum Electrolytic Capacitors", Capacitance=100µF, Case/Package=Radial, ESR (Equivalent Series Resistance)=393.664mΩ, Insulation Resistance=1MΩ, Leakage Current=16µA, Max Operating Temperature=105°C, Min Operating Temperature=-55°C, Ripple Current=255mA, Voltage Rating=16V, Diameter=6.3mm, Height=5.5mm, Impedance=440mΩ, Length=5.5mm, Life (Hours)=2000hours, Packaging="Cut Tape", REACH SVHC=Unknown, Ripple Current (AC)=255mA, Voltage Rating (DC)=16V
C4 C21: library part Capacitor_MLLC, Package=0603, Part Number=06035U4R7JAT2A, ComponentLink1Description="Online Store Link", Supplier=Mouser
C5 C17: library part Capacitor_MLLC, Package=0603, Part Number=CC0603KRX5R6BB105, ComponentLink1Description="Online Store Link", Supplier=Mouser
C6: library part Capacitor_MLLC, Package=0603, Part Number=CC0603MRX6S4BB226, ComponentLink1Description="Online Store Link", Supplier=Mouser
C7 C11 C28: library part Capacitor_MLLC, Package=0603, Part Number=06036G225ZAT2A, ComponentLink1Description="Online Store Link", Supplier=Mouser
C18: library part Capacitor_MLLC, Package=0603, Part Number=C0603C106M7PAC7411, ComponentLink1Description="Online Store Link", Supplier=Mouser
C19 C20: library part Capacitor_MLLC, Package=0603, Part Number=06031A300FAT2A, ComponentLink1Description="Online Store Link", Supplier=Mouser
D1 D12 D13: "Red 0805 CHIPLED LS R976N-R102 Osram Opto LS R976, CHIPLED 0805 Series Red LED, 633 nm, 2012 (0805), Rectangle Lens SMD Package", Manufacturer_Name="ams OSRAM", Manufacturer_Part_Number="LS R976", Mouser Part Number=720-LSR976D5178, Datasheet Link=http://uk.rs-online.com/web/p/products/4974804, Geometry.Height=0.4mm, Mouser Price/Stock=https://www.mouser.co.uk/ProductDetail/OSRAM-Opto-Semiconductors/LS-R976?qs=OIr7YF%252B2cWVTfzKl425Fkw%3D%3D, Part Number="LS R976", Supplier=Mouser
D2 D3 D5 D7: library part SMAJ12CA-HP6AT_13, "19.9V Clamp 30.2A Ipp Tvs Diode Surface Mount DO-214AC (SMA)", Manufacturer_Name=YAGEO, Manufacturer_Part_Number=SMAJ12CA-HP6AT/13, Datasheet Link=https://www.yageo.com/upload/media/product/productsearch/datasheet/cpc/tvs/SMAJ-HP6AT_1.pdf, Geometry.Height=2.5mm, Part Number=SMAJ12CA-HP6AT/13, Supplier=Mouser
D4 D6 D8 D9: "ESD Suppressors / TVS Diodes 3.3V 4 LINE LOW CAP", Manufacturer_Name=SEMTECH, Mouser Part Number=947-RCLAMP3354S.TCT, Datasheet Link=https://semtech.my.salesforce.com/sfc/p/#E0000000JelG/a/44000000MCrm/q3IJaquvh9BkANCL4E8HYT8vxS.k3jwPHRhsWr6XNsI, Geometry.Height=1.45mm, Manufacturer_Part_Number=RCLAMP3354S.TCT, Mouser Price/Stock=https://www.mouser.co.uk/ProductDetail/Semtech/RCLAMP3354S.TCT?qs=rBWM4%252BvDhIcjyMg1J9MbMw%3D%3D, Part Number=RCLAMP3354S.TCT, Supplier=Mouser
D10: "SMD Planra Zener Diode", Manufacturer_Name=Diotec, Mouser Part Number=637-ZMM33B, Geometry.Height=1.45mm, Manufacturer_Part_Number=ZMM33B, Mouser Price/Stock=https://www.mouser.co.uk/ProductDetail/Diotec-Semiconductor/ZMM33B?qs=OlC7AqGiEDlS5hTI7j6ASg%3D%3D, Part Number=ZMM33B, Supplier=Mouser
D11: library part AQ1205-01LTG, "7pF, 7A, SOD523, Bidirectional Discrete TVS Diode, General Purpose ESD Protection", Manufacturer_Name=LITTELFUSE, Datasheet Link=https://www.littelfuse.com/assetdocs/littelfuse-tvs-diode-array-aq1205-01ltg-datashee?assetguid=bd1b547a-f82e-4cfc-8f41-242773d1850e, Geometry.Height=0.77mm, Manufacturer_Part_Number=AQ1205-01LTG, Part Number=AQ1205-01LTG, Supplier=Mouser
F1: library part 0603L100SLYR, "Description", Manufacturer_Name="Littelfuse Inc", Copyright="Copyright (C) 2025 Ultra Librarian. All rights reserved.", Manufacturer_Part_Number=0603L100SLYR, Part Number=0603L100SLYR, RefDes=RefDes, Supplier=Mouser, Type=Type
J1: library part XT30PW-M, "30A Low Temperature Rise Fire Retardant Plug", Manufacturer_Name=Amass, Datasheet Link=https://www.tme.eu/sl/Document/ce4077e36b79046da520ca73227e15de/XT30PW%20SPEC.pdf, Geometry.Height=5mm, Manufacturer_Part_Number=XT30PW-M, Part Number=XT30PW-M
J2 J3 J5: "1.25mm Pitch, PicoBlade PCB Header, Single Row, Right-Angle, Surface Mount, Tin (Sn) Plating, Friction Lock,  Circuits, Tape and Reel", Manufacturer_Name=Molex, Mouser Part Number=538-53261-0671, Datasheet Link=https://www.molex.com/pdm_docs/sd/532610671_sd.pdf, Geometry.Height=3.6mm, Manufacturer_Part_Number=53261-0671, Mouser Price/Stock=https://www.mouser.co.uk/ProductDetail/Molex/53261-0671?qs=%252B72YyncTwW9Wyr77z4J2cA%3D%3D, Part Number=53261-0671, Supplier=Mouser
L1: library part CMP-02424-000385-1, "Commercial Inductors, High Temperature (155 °C) Series 22uH 3.7A 110.21mΩ 20%", Case/Package=3232, Current Rating=3.7A, Inductance=22uH, Max DC Current=3.8A, Max Operating Temperature=155°C, Min Operating Temperature=-55°C, Package Quantity=500, Part Number=IHLP3232DZER220M51, Self Resonant Frequency=9MHz, Test Frequency=100kHz, Tolerance=20%, Height=4mm, Height - Seated (Max)=0.158inch, Lead Free="Lead Free", Length=0.322inch, Military Standard=Not, Mount="Surface Mount", Packaging="Tape and Reel", Saturation Current=3.8A, Shielding=Shielded, Supplier=Mouser, Termination=SMD/SMT, Width=0.322inch
P1: library part CMP-2000-07080-1, "Male Header, Pitch 1 mm, 1 x 6 Position, Height 2.95 mm, -25 to 85 degC, RoHS, Tape and Reel", Manufacturer=JST, Package Description="Male Header, Pitch 1 mm, 1 X 6 Position, Height 2.9 mm", Package Reference=SM06B-SRSS-TB, Datasheet URL=https://datasheet.ciiva.com/26894/getdatasheetpartid-708885-26894671.pdf, Datasheet Version=11/2010, Manufacturer URL=http://www.jst.com/home2.html, Manufacturer_Name=JST, Mounting Technology=SurfaceMount, No of Positions=6, Part Number=SM06B-SRSS-TB(LF)(SN), Pitch=1mm, Style/Orientation=RightAngleHeader/Plug, Supplier=Mouser, Termination=Solder, Type=ShroudedHeader
Q1 Q2: library part CMP-20235-000001-1, "NPN TRANSISTOR 1.5A 40V SOT-23 R", Case/Package=TO-236-3, Collector Emitter Breakdown Voltage=25V, Collector Emitter Voltage (VCEO)=400mV, Max Collector Current=1.5A, Max Power Dissipation=300mW, Transition Frequency=100MHz, Max Breakdown Voltage=25V, Mount="Surface Mount", Packaging="Tape and Reel", Part Number=SS8050-G, RoHS Compliant=Yes, Supplier=Mouser
R1 R26 R31: library part Resistor_SMD, Package=0603, Part Number=CR0603-JW-121ELF, ComponentLink1Description="Online Store Link", Supplier=Mouser
R2 R3 R5 R13: library part Resistor_SMD, Package=0603, Part Number=AF0603FR-13100KL, ComponentLink1Description="Online Store Link", Supplier=Mouser
R4: library part Resistor_SMD, Package=0603, Part Number=CRCW060322K1FKEBC, ComponentLink1Description="Online Store Link", Supplier=Mouser
R6 R7 R14 R15 R16 R17 R18 R19 R20 R21 R22 R23 R28 R30: library part Resistor_SMD, Package=0603, Part Number=CR0603AFX-1002EAS, ComponentLink1Description="Online Store Link", Supplier=Mouser
R8 R9 R24 R25 R27 R32 R33: library part Resistor_SMD, Package=0603, Part Number=CR0603-JW-221ELF, ComponentLink1Description="Online Store Link", Supplier=Mouser
R10 R11: library part Resistor_SMD, Package=0603, Part Number=AC0603JR-104K7L, ComponentLink1Description="Online Store Link", Supplier=Mouser
R12: library part Resistor_SMD, Package=0603, Part Number=CR0603-JW-274ELF, ComponentLink1Description="Online Store Link", Supplier=Mouser
R29: library part Resistor_SMD, Package=0603, Part Number=CR0603AJ/-000ELF, ComponentLink1Description="Online Store Link", Supplier=Mouser
SW1 SW2 SW3 SW4 SW5: "Body Features: Actuator Profile Extended", Manufacturer_Name="TE Connectivity", Mouser Part Number=506-USLPT2616CT2TR, Datasheet Link=https://www.te.com/commerce/DocumentDelivery/DDEController?Action=srchrtrv&DocNm=2337224-1&DocType=Data%20Sheet&DocLang=English&PartCntxt=2337224-1&DocFormat=pdf, Geometry.Height=0.55mm, Manufacturer_Part_Number=USLPT2616CT2TR, Mouser Price/Stock=https://www.mouser.co.uk/ProductDetail/TE-Connectivity-Alcoswitch/USLPT2616CT2TR?qs=qSfuJ%252Bfl%2Fd725nA8XgU6qQ%3D%3D, Part Number=USLPT2616CT2TR, Supplier=Mouser
U1: library part CMP-00572-88255842-3, "Inverter RoHS Compliant Adjustable Positive Switching Regulator IC 125C 2MHz 1A 82.298666mg", Case/Package=DFN, Manufacturer Lifecycle Status=ACTIVE, Max Input Voltage=40V, Max Junction Temperature (Tj)=125°C, Max Output Current=1A, Max Output Voltage=34V, Min Input Voltage=3V, Min Operating Temperature=-40°C, Min Output Voltage=600mV, Operating Supply Current=4µA, Operating Supply Voltage=36V, Quiescent Current=80µA, Switching Frequency=2MHz, ComponentLink1Description="Manufacturer's Website", ComponentLink1URL=http://www.renesas.com, ComponentLink2Description="Datasheet URL", ComponentLink2URL=https://octopart.com/cad-content/api/get-model-datasheet/15189/88255842, ComponentLink3Description="Manufacturer's Package Drawing", ComponentLink3URL=https://www.renesas.com/en/document/psc/l124x3-12-lead-dual-flat-no-lead-plastic-package?r=568491, Efficiency=94%, Export Control Classification Number (ECCN) Code=EAR99, Height=900µm, HelpURL=https://octopart.com/cad-content/api/get-model-datasheet/15189/88255842, Lead Free="Lead Free", Length=4mm, Lifecycle Status=Production, Logic Function=Inverter, Max Operating Temperature=125°C, Max Supply Voltage=40V, Min Supply Voltage=3V, Mount="Surface Mount", Number of Outputs=1, Number of Pins=12, Output Configuration=Positive, Output Current=1A, Output Type=Adjustable, Output Voltage=34V, Packaging="Tape & Reel", Part Number=ISL85410FRZ-T, Pitch=500µm, Radiation Hardening=No, RAM Size=12kB, RoHS=Compliant, Supplier=Mouser, Sync/Async=Synchronous, Synchronous Rectifier=Yes, Topology=Buck, Weight=82.298666mg, Width=3mm
U2: "Hot Swap Voltage Controllers Electronic fuse 4V 3.6A 40mW 4.5V", Manufacturer_Name=STMicroelectronics, Mouser Part Number=511-STEF4SPUR, Datasheet Link=https://www.st.com/resource/en/datasheet/stef4s.pdf, Geometry.Height=0.8mm, Manufacturer_Part_Number=STEF4SPUR, Mouser Price/Stock=https://www.mouser.co.uk/ProductDetail/STMicroelectronics/STEF4SPUR?qs=DqCdCwOw4%2F72PHOKVsUxjg%3D%3D, Part Number=STEF4SPUR, Supplier=Mouser
U3 U4: "MOSFET P Channel 30V 7.1A 2.1V @ 250uA 45m @ 6A,10V SOP-8_150mil RoHS", Manufacturer_Name="Diodes Incorporated", Mouser Part Number=621-DMP3056LSS-13, Datasheet Link=https://www.diodes.com//assets/Datasheets/ds31421.pdf, Geometry.Height=1.7mm, Manufacturer_Part_Number=DMP3056LSS-13, Mouser Price/Stock=https://www.mouser.co.uk/ProductDetail/Diodes-Incorporated/DMP3056LSS-13?qs=oUsD4qhOtFyEnPLZKitYRA%3D%3D, Part Number=DMP3056LSS-13, Supplier=Mouser
U5: "Multiprotocol Modules ESP32-WROOM-32E integrates ESP32-D0WD-V3, with higher stability and safety performance.", Manufacturer_Name="Espressif Systems", Mouser Part Number=356-ESP32WRM32EN8R2, Datasheet Link=https://www.espressif.com/sites/default/files/documentation/esp32-wroom-32e_esp32-wroom-32ue_datasheet_en.pdf, Geometry.Height=3.25mm, Manufacturer_Part_Number=ESP32-WROOM-32E-N8R2, Mouser Price/Stock=https://www.mouser.co.uk/ProductDetail/Espressif-Systems/ESP32-WROOM-32E-N8R2?qs=By6Nw2ByBD0mvGJSS3Ohlw%3D%3D, Part Number=ESP32-WROOM-32E-N8R2, Supplier=Mouser
U6: library part CMP-231853-000001-1, "RX TXRX MODULE 802.15.4 CHIP SMD", Part Number=DWM1000, Supplier=TME
U7: library part CMP-12177-000012-1, "CONSUMER MEMS", Manufacturer=STMicroelectronics, Max Supply Voltage=3.6V, Min Supply Voltage=1.62V, Operating Supply Current=0.55mA, Package=LGA-14L-DM00249496, Temperature="-40°C to +85°C", Temperature Range High=+85°C, Temperature Range Low=-40°C, Category=IC, ComponentLink2Description=Datasheet, ComponentLink2URL=https://www.st.com/resource/en/datasheet/lsm6dso.pdf, Device Class L1=Sensors, Device Class L2="Motion Sensors", Device Class L3="Inertial Measurement Units (IMUs)", Digikey Description="CONSUMER MEMS", Footprint Url=https://www.st.com/content/ccc/resource/technical/document/technical_note/73/17/9c/16/dd/96/4a/01/CD00134799.pdf/files/CD00134799.pdf/jcr:content/translations/en.CD00134799.pdf, Gyro Range=125/250/500/1000/2000°/s, Height=0.86mm, Lead Free=Yes, Manufacturer Part Number=LSM6DSOTR, Manufacturer_Name=STMicroelectronics, Manufacturer_Part_Number=LSM6DSOTR, Mouser Description="iNEMO inertial module: \"always-on\" integrated 3D accelerometer and 3D gyroscope", Octopart=https://octopart.com/lsm6dsotr-stmicroelectronics-81706672, Part Number=LSM6DSOTR, RoHS=TRUE, Sensor Output=I2C,SPI, Sensor Type=Temperature,Accelerometer,Gyroscope, Supplier=Mouser
U8: "3-AXIS MAGNETIC SENSOR", Manufacturer_Name=MEMSIC, Mouser Part Number=438-MMC5983MA, Datasheet Link=https://www.mouser.com/datasheet/2/821/Memsic_09102019_MMC5983MA_Datasheet_Rev_A-1635338.pdf, Geometry.Height=1mm, Manufacturer_Part_Number=MMC5983MA, Mouser Price/Stock=https://www.mouser.co.uk/ProductDetail/MEMSIC/MMC5983MA?qs=B6kkDfuK7%2FD5qasHMdEt2g%3D%3D, Part Number=MMC5983MA, Supplier=Mouser
U9: "Arm-Cortex-M4 32b MCU+FPU, 125 DMIPS, up to 1.5MB flash, 320KB RAM, USB OTG FS, 1 ADC, 2 DACs, 2 DFSDMs", Manufacturer_Name=STMicroelectronics, Mouser Part Number=511-STM32F413RHT3, Datasheet Link=https://www.st.com/resource/en/datasheet/stm32f413cg.pdf, Geometry.Height=1.6mm, Manufacturer_Part_Number=STM32F413RHT3, Mouser Price/Stock=https://www.mouser.co.uk/ProductDetail/STMicroelectronics/STM32F413RHT3?qs=FNcb6ahWXRwlxxHMGg5GHA%3D%3D, Part Number=STM32F413RHT3, Supplier=Mouser
X1: library part CMP-0277-00003-1, "Ceramic Surface Mount Low Profile Quartz Crystal, 8 MHz, -20 to 70 degC, 4-Pin 6 x 3.6 x 1.2 mm SMD, RoHS, 1000pcs / Reel", Frequency="8 MHz", Load Capacitance CL="18 pF Typ.", Manufacturer=Abracon, Part Number=ABMM2-8.000MHZ-E2-T, Shunt Capacitance C0="7 pF Max.", Temperature Range="-20 to 70 degC", ComponentLink1Description="Manufacturer URL", ComponentLink1URL=http://www.abracon.com/, ComponentLink2Description=Datasheet, ComponentLink2URL=http://www.abracon.com/Resonators/ABMM2.pdf, ComponentLink3Description="Package Specification", ComponentLink3URL=http://www.abracon.com/Resonators/ABMM2.pdf, ESR="72 Ohm Max.", Manufacturer_Name=Abracon, Mounting Technology="Surface Mount", PackageDescription="4-Pin SMD, Body 6 x 3.6 mm, Pitch 4.4 mm", Packing="1000pcs / Reel", PartNumber=ABMM2-8.000MHZ-E2-T, RoHS=TRUE, Supplier=Mouser

## Free pads (board coordinates)
  round 2.8 hole 2.8 unplated: 2(-33.5,-26.5) 2(-33.5,15) 2(33.5,-26.5) 2(33.5,26.5)

## Via types
v1: diameter 0.6, hole 0.3, Top Layer to Bottom Layer, 231 vias
v2: diameter 0.7, hole 0.4, Top Layer to Bottom Layer, 1 vias

## Nets (pads, with @x,y where several pads share a name; then routed paths per layer and width w, separated by ;. In a path a pad name is that pad's centre, name@x,y a point inside that pad or via, vN(x,y) a via of type N, cw(c..) or ccw(c..) an arc to the next point about the centre after c; other vN are vias at no path point)
3V3: C2.2 C3.1 C7.1 C8.1 C9.1 C10.1 C11.1 C15.2 C16.2 C17.2 C22.2 C23.2 C24.2 C25.2 C26.2 C27.2 C28.2 C30.2 D1.2 J2.1 L1.2 R2.1 R10.1 R11.1 R14.1 R18.2 R21.2 R22.2 R30.2 R33.1 U2.8 U2.9 U2.10 U5.2 U6.5 U6.6 U6.7 U7.2 U7.3 U7.5 U7.8 U8.2 U8.13 U9.1 U9.13 U9.19 U9.32 U9.48 U9.64 | length 85.6
  Top Layer w0.2: C15.2@-3.5,6.225 -3.413,6.313 U7.8@-0.663,6.313 ; C17.2@-2.9,12.825 -2.45,12.825 -1.55,13.725 U8.13@-1.025,13.725 -0.975,13.675 -0.69,13.675 -0.4,13.385 -0.4,12.385 -0.06,12.045 -0.06,11.942 -0.05,11.932 -0.05,11.75 U8.2@0,11.7 ; U7.5@1,6.475 1.075,6.4 1.075,6.013 1.251,5.838 1.637,5.838 U7.3@1.662,5.813 U7.2@1.662,5.313
  Top Layer w0.254: v1(-30,10.6) v1@-29.975,10.575 ; v1(-27,11.7) v1@-26.95,11.75 ; v1(-4.6,-16.4) -4.6,-16.347 -4.451,-16.198 -3.331,-16.198 R11.1@-3.033,-15.9 ; C24.2@-3.25,-13.425 -2.369,-13.425 -1.859,-12.915 -1.859,-12.783 -1.326,-12.25 U9.48@-0.738,-12.25 ; C25.2@-0.1,-0.3 0.3,-0.7 0.3,-1.1 1.227,-2.027 1.227,-2.739 U9.32@1.25,-2.762 ; U7.5@1,6.475 v1(1,8.4) ; v1@2.881,-20.981 R10.1@2.881,-20.031 ; U9.19@7.75,-2.762 7.773,-2.739 7.773,-1.683 8.325,-1.131 C23.2@8.325,-0.25 ; U9.64@8.75,-14.238 8.75,-15.356 9.677,-16.283 9.677,-16.427 C26.2@10,-16.75 ; U9.1@10.738,-12.25 11.326,-12.25 11.576,-12.5 C27.2@13.025,-12.5 ; U9.13@10.738,-6.25 10.761,-6.227 11.611,-6.227 12.44,-5.398 12.627,-5.398 13.2,-4.825 C22.2@13.25,-4.825 C28.2@15,-4.825 ; v1(26.6,-19) C30.2@26.6,-17.875
  Top Layer w0.5: v1(-30.5,9.8) C11.1@-30.5,8.675 C10.1@-28.75,8.675 ; v1@-29.975,10.575 C9.1@-28.75,10.575 ; C9.1@-28.7,10.575 -28.475,10.35 U6.6@-25.09,10.35 U6.5@-25.09,11.75 v1@-26.95,11.75 ; C10.1@-28.563,8.813 -28.425,8.95 U6.7@-25.09,8.95 ; v1(-27.7,-18.4) -27.43,-18.13 -27.43,-17.2 U5.2@-27.23,-17 ; v1(-27.5,-20.6) -27.481,-20.619 -27.256,-20.619 -26.425,-21.45 C7.1@-26.425,-21.5 C8.1@-26.425,-19.75 ; v1(-13.1,-23.1) -13.081,-23.119 -13.081,-23.269 -12.5,-23.85 J2.1@-12.5,-24.25 ; R21.2@-7.55,2.5 -7.375,2.675 -7.375,3.507 -7.32,3.507 -7.027,3.8 v1(-7,3.8) ; R14.1@-7.1,7.75 v1(-7.1,9) ; v1(-4.4,-13.4) -4.388,-13.412 -3.263,-13.412 C24.2@-3.25,-13.425 ; v1(-4.2,12.8) -4.175,12.825 C17.2@-2.9,12.825 ; C15.2@-3.5,6.225 -3.5,5.2 v1(-3.4,5.1) ; v1(-0.9,0.3) -0.881,0.281 -0.581,0.281 -0.1,-0.2 C25.2@-0.1,-0.25 ; v1(1,8.4) C16.2@1,8.8 ; R10.1@2.75,-19.9 R10.1@2.881,-20.031 ; v1(8.1,0.9) 8.325,0.675 C23.2@8.325,-0.25 ; C26.2@10,-16.75 10,-16.8 v1(11.2,-18) ; C27.2@13.025,-12.5 13.225,-12.7 13.225,-13.425 v1(13.5,-13.7) ; C28.2@15,-4.825 15.2,-4.625 16.075,-4.625 v1(16.3,-4.4) ; v1(18,12.2) 18.05,12.15 D1.2@18.05,10.65 ; v1(22.5,16.3) R2.1@22.5,17.2 ; v1(29.4,24.975) 29.4,23.975 C2.2@29.5,23.875
  Bottom Layer w0.254: R22.2@-21,-17.1 v1(-21,-14) ; U2.10@0.7,-24.25 U2.9@0.7,-23.75 U2.8@0.7,-23.25 1.45,-23.25 1.6,-23.1 ; v1(27.788,-24.912) 27.888,-24.812 R30.2@27.888,-23.412 ; v1(27.9,-15) 27.994,-15 28.419,-15.425 28.425,-15.425 28.752,-15.752 28.752,-16.402 29.05,-16.7 R33.1@29.1,-16.7
  Bottom Layer w0.3: 1.6,-23.1 1.9,-22.8
  Bottom Layer w0.4: 1.9,-22.8 2.2,-22.5
  Bottom Layer w0.5: R18.2@-14.65,-4.1 -14.65,-5.25 v1(-14.6,-5.3) ; 2.2,-22.5 2.881,-21.819 2.881,-21.019 v1(2.9,-21)
  other v1: 9.5,13.6 10.4,15.2 13.4,15.3 14.8,15.3 16.2,15.3 12.7,16 14.1,16 15.5,16 16.9,16
Battery_Protected: C4.2 F1.2 R3.2 U1.4 | length 1.4
  Top Layer w0.254: v1(24.2,18.8) 25.152,18.8 R3.2@25.45,18.5 R3.2@25.45,18.5
  other v1: 22.5,21.925
Battery_Voltage_Measurement: D10.1 R12.2 R13.1 U9.8 | length 23
  Top Layer w0.254: U9.8@10.738,-8.75 12.054,-8.75 12.431,-9.127 13.255,-9.127 13.782,-8.6 v1(14.7,-8.6)
  Bottom Layer w0.254: R12.2@14.6,-21.6 R13.1@12.65,-21.6 12.65,-20.725 13.6,-19.775 D10.1@13.6,-19.4 13.6,-19.025 13.948,-18.677 14.723,-18.677 17.5,-15.9 17.5,-11.3 14.8,-8.6 v1(14.7,-8.6)
Converter_Out: C1.1 L1.1 U1.5
DWM_IRQ: R17.2 U5.28 U6.22 | length 20.7
  Top Layer w0.254: U5.28@-15.8,0.5 -15.8,0.8 -15.307,1.293 -15.307,1.385 -13.55,3.143 -12.257,3.143 -10.1,5.3 -10.1,12.35 -9.315,13.135 -9.315,13.535 R17.2@-9.05,13.8 -9.348,14.098 -9.348,14.284 -9.614,14.55 U6.22@-12.5,14.55
DWM_RST: U5.36 U6.3 | length 16.8
  Top Layer w0.254: v1(-25.9,3.8) -22.8,6.9 -22.8,13.8 -23.177,14.177 -24.717,14.177 U6.3@-25.09,14.55
  Bottom Layer w0.254: v1(-25.9,0.9) v1(-25.9,3.8)
DWM_SPI_CLK: U5.30 U6.20 | length 14.1
  Top Layer w0.254: U5.30@-18.34,0.5 -18.017,0.823 -18.017,7.02 -13.86,11.177 -13.798,11.177 -13.225,11.75 U6.20@-12.5,11.75
DWM_SPI_CS: R14.2 U5.29 U6.17 | length 16.6
  Top Layer w0.254: U5.29@-17.07,0.5 -16.747,0.823 -16.747,4.59 -14.16,7.177 -12.873,7.177 U6.17@-12.5,7.55 -11.873,7.55 -11.5,7.177 v1(-11.5,6) ; v1(-8.9,6) -8.9,6.094 -8.698,6.296 -8.698,7.452 R14.2@-8.4,7.75
  Bottom Layer w0.254: v1(-11.5,6) v1(-8.9,6)
DWM_SPI_MISO: U5.31 U6.19 | length 14.6
  Top Layer w0.254: U5.31@-19.61,0.5 -19.287,0.823 -19.287,6.613 v1(-18.8,7.1) ; v1(-16.9,7.1) -14.023,9.977 -12.873,9.977 U6.19@-12.5,10.35
  Bottom Layer w0.254: v1(-18.8,7.1) v1(-16.9,7.1)
DWM_SPI_MOSI: U5.37 U6.18 | length 18.6
  Top Layer w0.254: U5.37@-27.23,0.5 -26.907,0.823 -26.907,1.293 -26.9,1.3 -26.9,1.392 -22.392,5.9 v1(-20.1,5.9) ; v1(-17,5.9) -16.934,5.966 -16.634,5.966 -14.023,8.577 -12.873,8.577 U6.18@-12.5,8.95
  Bottom Layer w0.254: v1(-20.1,5.9) v1(-17,5.9)
EN: C13.1 Q1.3 R22.1 SW2.1 SW2.3 U5.3 | length 21.4
  Top Layer w0.254: v1(-28.829,-24.623) -28.829,-20.742 -26.283,-18.196 -26.283,-17.323 -25.918,-16.958 -25.918,-16.018 -25.4,-15.5 v1(-22.5,-15.5) ; v1(-21.9,-18.9) -21.375,-19.425 SW2.1@-20.625,-19.425
  Bottom Layer w0.254: v1(-28.829,-24.623) -28.766,-24.687 -27.803,-24.687 Q1.3@-27.74,-24.75 ; v1(-22.5,-15.5) -22.566,-15.566 -22.566,-15.765 -22.75,-15.949 C13.1@-22.75,-18.65 -22.5,-18.9 v1(-21.9,-18.9) -21.806,-18.9 -21.604,-18.698 -21.298,-18.698 R22.1@-21,-18.4
ESC_Batt: P1.2 R12.1 | length 3.5
  Top Layer w0.254: P1.2@16.9,-24.325 16.9,-22.894 17.1,-22.694 v1(17.1,-22.6)
  Bottom Layer w0.254: R12.1@15.9,-21.6 15.9,-21.65 16.784,-22.534 17.034,-22.534 v1(17.1,-22.6)
ESC_P1: D8.1 P1.3 U9.44 | length 31
  Top Layer w0.2: 8.2,-12.5 8.324,-12.5 9.024,-13.2 9.9,-14.076 9.9,-14.2
  Top Layer w0.254: U9.44@-0.738,-10.25 5.95,-10.25 8.2,-12.5 ; 9.9,-14.2 17.9,-22.2 P1.3@17.9,-24.325 ; v1(16.1,-26.7) 16.166,-26.634 16.166,-26.534 16.8,-25.9 17.451,-25.9 17.6,-25.751 17.6,-25.1 P1.3@17.9,-24.8
  Bottom Layer w0.254: v1(16.1,-26.7) 16.166,-26.766 16.166,-27.24 16.744,-27.817 16.842,-27.817 17.175,-28.15 D8.1@17.45,-28.15
ESC_P2: D8.3 P1.4 U9.43 | length 30
  Top Layer w0.2: 8.4,-12 8.459,-12 10.392,-13.933 10.392,-14.006 10.411,-14.025
  Top Layer w0.254: U9.43@-0.738,-9.75 6.15,-9.75 8.4,-12 ; 10.411,-14.025 18.9,-22.513 P1.4@18.9,-24.325 18.738,-24.487 18.738,-25.481 18.7,-25.519 v1(18.7,-26.2)
  Bottom Layer w0.254: D8.3@17.45,-26.25 18.65,-26.25 v1(18.7,-26.2)
ESC_P3: D8.4 P1.5 U9.42 | length 32.2
  Top Layer w0.2: 8.9,-11.8 10.9,-13.8
  Top Layer w0.254: U9.42@-0.738,-9.25 6.35,-9.25 8.9,-11.8 ; 10.9,-13.8 19.9,-22.8 P1.5@19.9,-24.325 19.9,-26.706 19.5,-27.106 v1(19.5,-27.2)
  Bottom Layer w0.254: v1(19.5,-27.2) 19.5,-27.1 19.502,-27.098 19.502,-26.423 19.725,-26.2 19.9,-26.2 D8.4@19.95,-26.25
ESC_P4: D8.5 P1.6 U9.41 | length 33.9
  Top Layer w0.254: U9.41@-0.738,-8.75 6.95,-8.75 v1(9.1,-10.9) ; v1(11.804,-13.614) 11.804,-13.704 20.9,-22.8 P1.6@20.9,-24.325 20.9,-24.8 21.5,-25.4 v1(21.5,-26.2)
  Bottom Layer w0.254: v1(9.1,-10.9) 9.1,-10.905 11.804,-13.609 v1(11.804,-13.614) ; D8.5@19.95,-28.15 20.225,-28.15 20.398,-27.977 20.398,-27.302 v1(21.5,-26.2)
ESP_Button_1: C14.2 SW3.1 SW3.3 U5.9 | length 5.7
  Top Layer w0.2: U5.9@-18.34,-17 -18.34,-17.3 -17.81,-17.83 -17.81,-18.29 -16.633,-19.467 -16.183,-19.467 SW3.3@-16.175,-19.475
  Top Layer w0.254: SW3.3@-16.168,-19.605 SW3.1@-15.418,-19.605 ; SW3.1@-15.425,-19.475 -14.866,-20.034 -14.466,-20.034 v1(-14.4,-20.1)
ESP_DTR: D9.1 J5.2 Q2.2 R20.1 | length 10.8
  Top Layer w0.254: v1(-28.1,-22.3) -28.034,-22.366 -26.734,-22.366 -26,-23.1 J5.2@-26,-24.25 v1(-26,-25.5)
  Bottom Layer w0.254: v1(-28.1,-22.3) -28.1,-22.206 -28.013,-22.119 -28.013,-21.623 -27.84,-21.45 Q2.2@-27.74,-21.45 ; v1(-26,-25.5) -26.8,-26.3 R20.1@-26.8,-27.2 -26.8,-27.25 -26.502,-27.548 -26.452,-27.548 -25.925,-28.075 D9.1@-24.275,-28.075
ESP_I2C_Interrupt: U5.13 U9.57 | length 21.7
  Top Layer w0.254: U5.13@-13.26,-17 -12.937,-16.677 -12.937,-16.285 -12.252,-15.6 -4.095,-15.6 -3.643,-15.148 -2.422,-15.148 -0.87,-16.7 3.638,-16.7 5.227,-15.111 5.227,-14.261 U9.57@5.25,-14.238
ESP_RTS: D9.3 J5.3 Q1.2 R23.1 | length 12
  Top Layer w0.254: J5.3@-24.75,-24.25 -24.5,-24.5 v1(-24.5,-25.4)
  Bottom Layer w0.254: Q1.2@-29.76,-23.8 -28.25,-23.8 -26.098,-21.648 -26.098,-21.548 -25.8,-21.25 -25.7,-21.25 -25.402,-21.548 -25.402,-21.648 -24.5,-22.55 v1(-24.5,-25.4) -24.5,-25.977 -24.327,-26.15 D9.3@-24.25,-26.15